# Altium PCB RSxxx для сумматора.PcbDoc
Units mm, origin at the board's own origin, x right, y up, seen from the top; angles counter-clockwise.
Board outline 22.3 x 25.4 mm, 2 copper layers (Top Layer, Bottom Layer), stack 1.5 mm thick; 18 components, 12 nets, 59 pads, 31 vias.
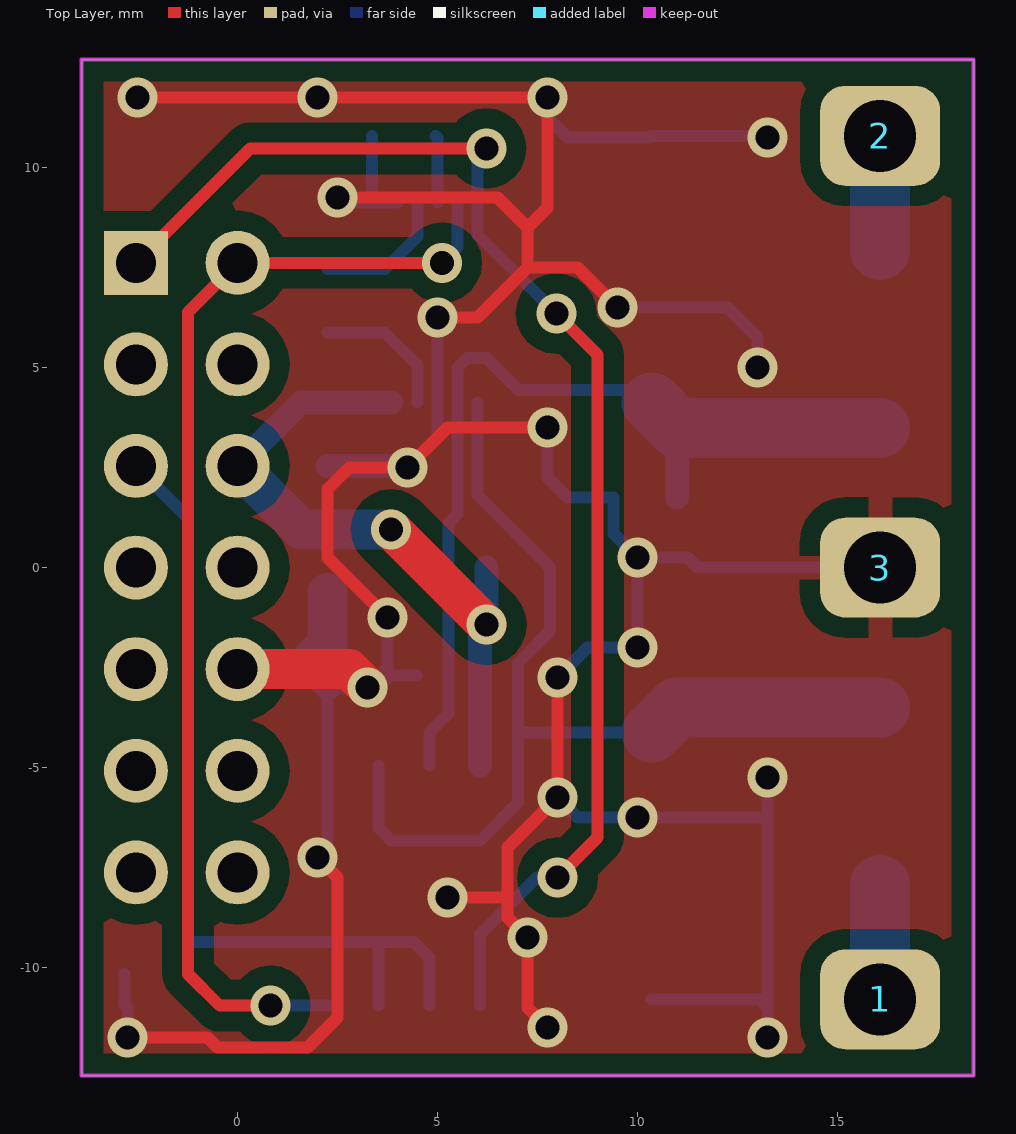
[diagram p0: Top Layer view]
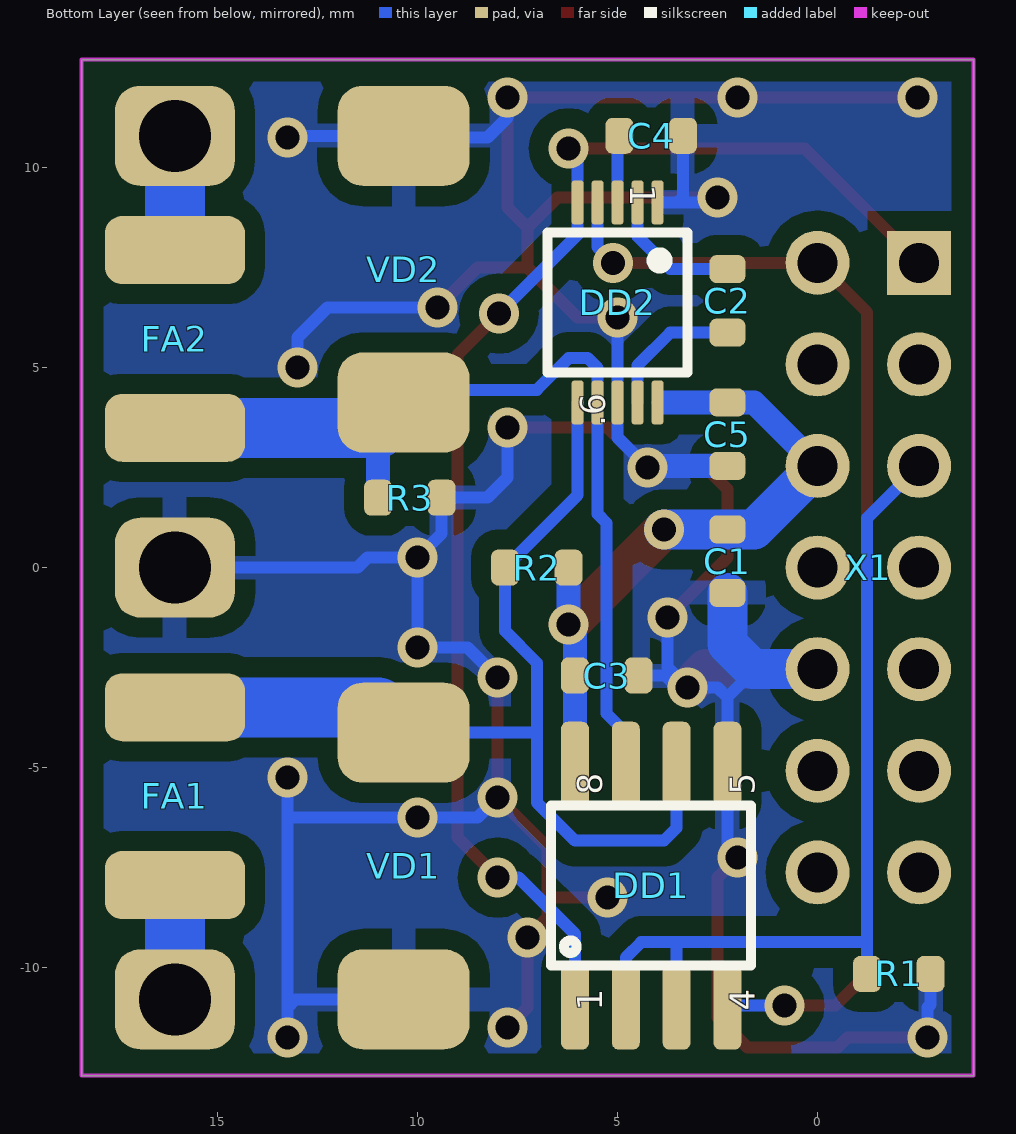
[diagram p1: Bottom Layer view, seen from below]
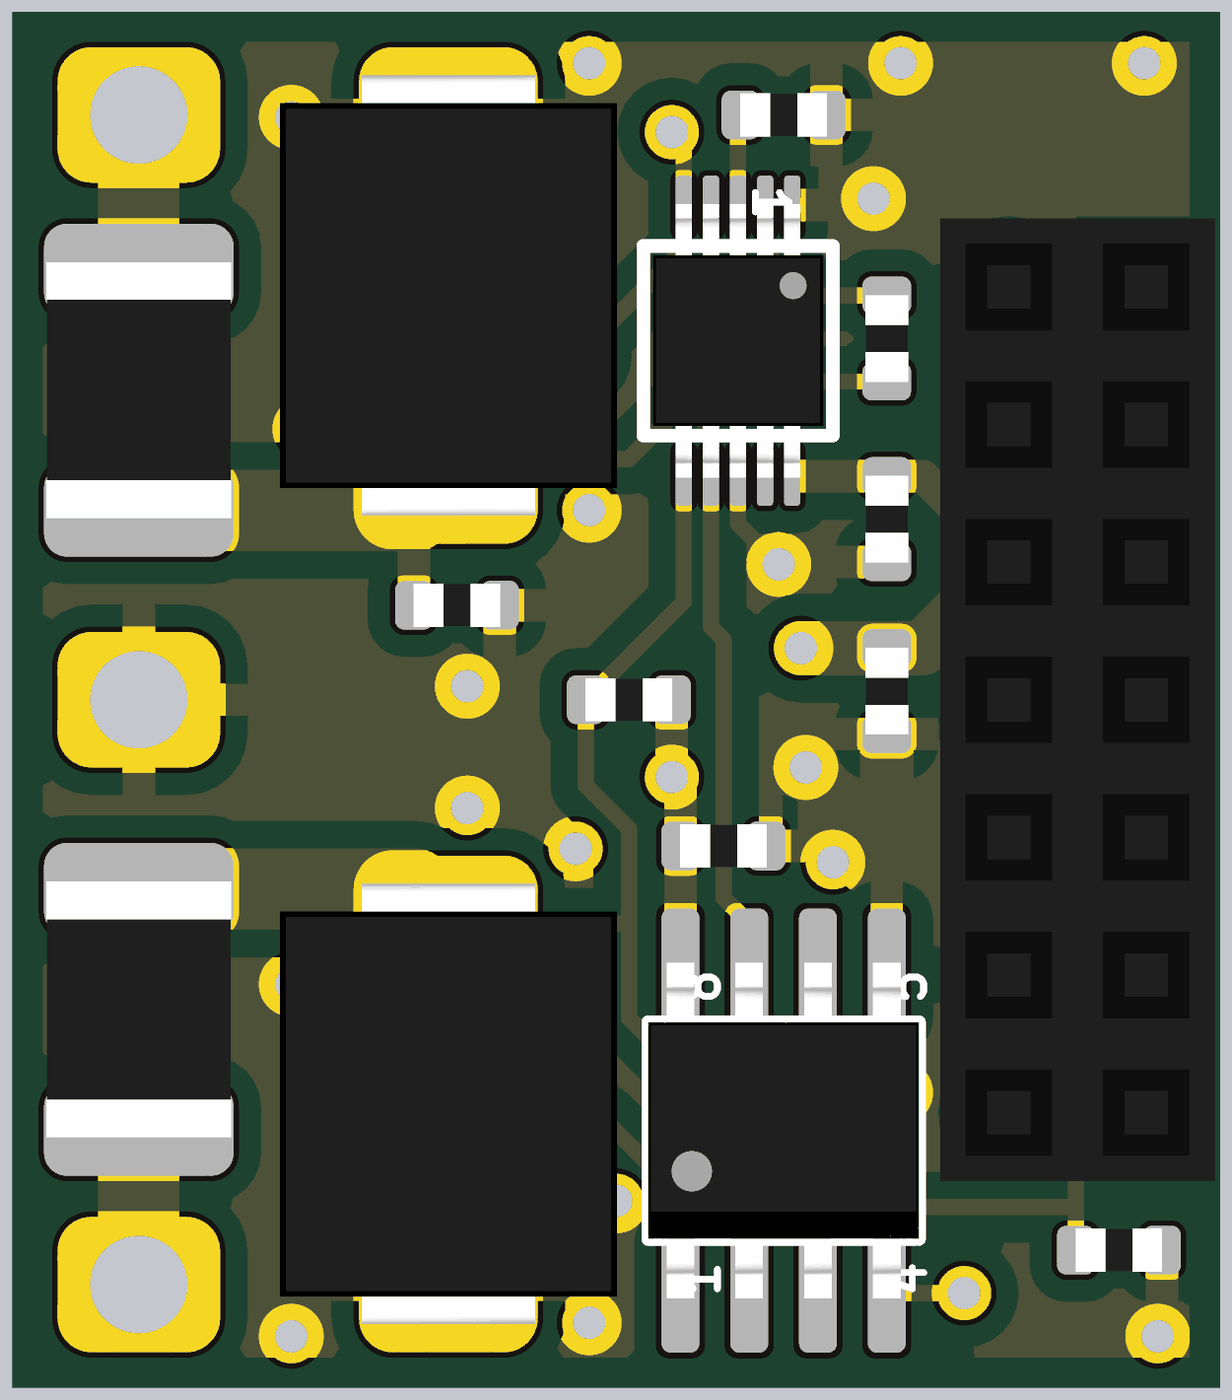
[diagram p2: 3D render of the assembled board from below, using the file's embedded part models]

## Layer stack, top to bottom
Top Layer: signal copper 0.045
Dielectric: core 1.41, FR-4, Dk 4.8
Bottom Layer: signal copper 0.045

## Board outline
-3.9,-12.7 -3.9,12.7 18.4,12.7 18.4,-12.7

## Design rules (kind name [scope] priority, off if disabled: settings)
Clearance Clearance_OutLay_Poly [inPoly and OnOutside] p1: gap=0.5
Clearance [All] p2: gap=0.2
Clearance "Clearance_Top Layer, Top_PadToPad" [ExistsOnLayer('Top Layer, Top') And IsPad vs ExistsOnLayer('Top Layer, Top') And IsPad] p3: gap=0.2
Clearance "Clearance_Top Layer, Top_PadToLine" [ExistsOnLayer('Top Layer, Top') And IsPad vs ExistsOnLayer('Top Layer, Top') And IsWire] p4: gap=0.2
Clearance "Clearance_Top Layer, Top_LineToLine" [ExistsOnLayer('Top Layer, Top') And IsWire vs ExistsOnLayer('Top Layer, Top') And IsWire] p5: gap=0.2
Clearance "Clearance_Top Layer, Top_ViaToPad" [ExistsOnLayer('Top Layer, Top') And IsVia vs ExistsOnLayer('Top Layer, Top') And IsPad] p6: gap=0.2
Clearance "Clearance_Top Layer, Top_ViaToLine" [ExistsOnLayer('Top Layer, Top') And IsVia vs ExistsOnLayer('Top Layer, Top') And IsWire] p7: gap=0.2
Clearance "Clearance_Top Layer, Top_ViaToVia" [ExistsOnLayer('Top Layer, Top') And IsVia vs ExistsOnLayer('Top Layer, Top') And IsVia] p8: gap=0.2
Clearance "Clearance_Bottom Layer, Bottom_PadToPad" [ExistsOnLayer('Bottom Layer, Bottom') And IsPad vs ExistsOnLayer('Bottom Layer, Bottom') And IsPad] p9: gap=0.2
Clearance "Clearance_Bottom Layer, Bottom_PadToLine" [ExistsOnLayer('Bottom Layer, Bottom') And IsPad vs ExistsOnLayer('Bottom Layer, Bottom') And IsWire] p10: gap=0.2
Clearance "Clearance_Bottom Layer, Bottom_LineToLine" [ExistsOnLayer('Bottom Layer, Bottom') And IsWire vs ExistsOnLayer('Bottom Layer, Bottom') And IsWire] p11: gap=0.2
Clearance "Clearance_Bottom Layer, Bottom_ViaToPad" [ExistsOnLayer('Bottom Layer, Bottom') And IsVia vs ExistsOnLayer('Bottom Layer, Bottom') And IsPad] p12: gap=0.2
Clearance "Clearance_Bottom Layer, Bottom_ViaToLine" [ExistsOnLayer('Bottom Layer, Bottom') And IsVia vs ExistsOnLayer('Bottom Layer, Bottom') And IsWire] p13: gap=0.2
Clearance "Clearance_Bottom Layer, Bottom_ViaToVia" [ExistsOnLayer('Bottom Layer, Bottom') And IsVia vs ExistsOnLayer('Bottom Layer, Bottom') And IsVia] p14: gap=0.2
Clearance Clearance_Design_HoleToHole [(IsVia Or IsThruPin) vs (IsVia Or IsThruPin)] p15: gap=0.2
ComponentClearance [All] p1: gap=0 collisioncheckmode=3 verticalgap=0 showdistances=FALSE
Height [All] p1: minheight=0 maxheight=50 prefheight=25
HoleSize [All] p1: absolutevalues=TRUE maxlimit=5 minlimit=0.6 maxpercent=80.000 minpercent=20.000
HoleToHoleClearance [All] p1: gap=0.2 allowstackedmicrovias=TRUE
MinimumSolderMaskSliver [All] p1: minsoldermaskwidth=0
PlaneClearance [All] p1: clearance=0.2
PlaneConnect [All] p1: planeconnectstyle=Relief reliefexpansion=0.5 reliefentries=4 reliefconductorwidth=0.6 reliefairgap=0.2
PolygonConnect PolygonConnect_14 [IsPolygon And InNet('0V') And OnLayer('Bottom Layer') vs IsVia] p1: connectstyle=Direct reliefconductorwidth=0.381 reliefentries=4 polygonreliefangle="90 Angle"
PolygonConnect PolygonConnect_13 [IsPolygon And InNet('0V') And OnLayer('Bottom Layer') vs IsPad] p2: connectstyle=Relief reliefconductorwidth=0.6 reliefentries=4 polygonreliefangle="90 Angle"
PolygonConnect PolygonConnect_2 [IsPolygon And InNet('0V') And OnLayer('Top Layer') vs IsVia] p3: connectstyle=Direct reliefconductorwidth=0.381 reliefentries=4 polygonreliefangle="90 Angle"
PolygonConnect PolygonConnect_1 [IsPolygon And InNet('0V') And OnLayer('Top Layer') vs IsPad] p4: connectstyle=Relief reliefconductorwidth=0.6 reliefentries=4 polygonreliefangle="90 Angle"
PolygonConnect [All] p5: connectstyle=Relief reliefconductorwidth=0.6 reliefentries=4 polygonreliefangle="90 Angle"
RoutingVias [All] p1: holewidth=0.6 width=1 viastyle="Through Hole" minholewidth=0.6 minwidth=1 maxholewidth=0.6 maxwidth=1
SilkToSilkClearance [All] p1: silktosilkclearance=0
SilkscreenOverComponentPads [All] p1: minsilkscreentomaskgap=0
SolderMaskExpansion [All] p1: expansion=0.1
Width [All] p1: maxlimit=3 minlimit=0.1 preferedwidth=0.3
19 further rules are at their usual default settings.

## Components (designator, comment, footprint, x,y, rotation, side; value= is the part's Value field where it differs from the comment)
1 "PAD D01,8 02,5x03.0" "PAD D01,8 02,5x03.0" 16.066,-10.795 r0 top
2 "PAD D01,8 02,5x03.0" "PAD D01,8 02,5x03.0" 16.066,10.795 r0 top
3 "PAD D01,8 02,5x03.0" "PAD D01,8 02,5x03.0" 16.066,0 r0 top
C1 "X7R 0603-50 В-0,1 мкФ±15 %" PAT0603 2.254,-0.635 r90 bottom
C2 "X7R 0603-50 В-0,1 мкФ±15 %" PAT0603 2.254,7.461 r270 bottom
C3 "X7R 0603-50 В-0,1 мкФ±15 %" PAT0603 4.477,-2.699 r0 bottom
C4 "X7R 0603-50 В-0,1 мкФ±15 %" PAT0603 3.365,10.795 r0 bottom
C5 "X7R 0603-50 В-0,1 мкФ±15 %" PAT0603 2.254,2.54 r90 bottom
DD1 "ADM485ARZ" "SO-08 (150MIL)" 6.064,-10.954 r90 bottom
DD2 "ADM101EARMZ" "SO-10 MIKRO" 4,9.128 r270 bottom
FA1 "GP-WSM010" GP-WMS010 16.066,-3.492 r270 bottom
FA2 "GP-WSM010" GP-WMS010 16.066,3.492 r90 bottom
R1 "0603 0,1 Вт-10 кОм±5 %" PAT0603 -2.826,-10.16 r0 bottom
R2 "0603 0,1 Вт-10 кОм±5 %" PAT0603 7.81,0 r180 bottom
R3 "0603 0,1 Вт-10 кОм±5 %" PAT0603 9.398,1.746 r0 bottom
VD1 "SM15T12CA" SMC 10.351,-10.796 r90 bottom
VD2 "SM15T12CA" SMC 10.351,10.795 r270 bottom
X1 "PBD-14" PBD-14 -2.54,7.62 r90 bottom

## Footprints (in the part's own frame and the unit in brackets; to place one, negate y for a bottom-side part, rotate by r counter-clockwise, add the part's x,y. Pads: shape width x height; smd on the part's side, far side on the other; paste and mask are expansions set on the pad)
GP-WMS010 [mm]
  rrect50% 1.7x3.5 smd: 1(0,0) 2(4.445,0)
  body extent -0.14,-1.71 4.59,1.71, height 0.83
"PAD D01,8 02,5x03.0" [mm]
  rrect50% 3x2.5 hole 1.8: 1(0,0)
PAT0603 [mm]
  rrect50% 0.7x0.9 smd: 1(0,0) 2(1.587,0)
  body extent -0.01,-0.4 1.59,0.4, height 0.82
PBD-14 [mm]
  rect 1.6x1.6 hole 1: 1(0,0)
  round 1.6 hole 1: 2(0,2.54) 3(-2.54,0) 4(-2.54,2.54) 5(-5.08,0) 6(-5.08,2.54) 7(-7.62,0) 8(-7.62,2.54) 9(-10.16,0) 10(-10.16,2.54) 11(-12.7,0) 12(-12.7,2.54) 13(-15.24,0) 14(-15.24,2.54)
  body extent -16.51,-1.27 1.27,3.81, height 8.42
SMC [mm]
  rrect50% 2.5x3.3 smd paste-25.4: 1(0,0) 2(6.668,0)
  body extent -0.73,-3.11 7.4,3.11, height 2.64
"SO-08 (150MIL)" [mm]
  rrect50% 2.2x0.7 smd mask-25.4: 1(0,0) 2(0,-1.27) 3(0,-2.54) 4(0,-3.81) 5(6,-3.81) 6(6,-2.54) 7(6,-1.27) 8(6,0)
  silkscreen extent 1,-4.41 5,0.6, body extent -0.1,-4.41 6.1,0.6, height 1.77
"SO-10 MIKRO" [mm]
  rrect50% 1.1x0.3 smd: 1(0,0) 2(0,-0.5) 3(0,-1) 4(0,-1.5) 5(0,-2) 6(5,-2) 7(5,-1.5) 8(5,-1) 9(5,-0.5) 10(5,0)
  silkscreen extent 0.75,-2.75 4.25,0.75, body extent -0.02,-2.58 5.02,0.58, height 1.11

## Via types
v1: diameter 1, hole 0.6, Top Layer to Bottom Layer, 31 vias

## Nets (pads, with @x,y where several pads share a name; then routed paths per layer and width w, separated by ;. In a path a pad name is that pad's centre, name@x,y a point inside that pad or via, vN(x,y) a via of type N, cw(c..) or ccw(c..) an arc to the next point about the centre after c; other vN are vias at no path point)
0V: 3.1 C1.1 C3.1 C4.1 C5.1 DD1.5 DD2.1 DD2.8 R1.1 R3.1 VD1.1 VD2.1 X1.10 | length 125.1
  Top Layer w0.3: v1(-2.75,-11.75) -0.75,-11.75 -0.5,-12 1.75,-12 2.5,-11.25 2.5,-7.75 v1(2,-7.25) ; v1(-2.5,11.75) v1(2,11.75) v1(7.75,11.75) 7.75,9 7.25,8.5 ; v1(2.5,9.25) 6.5,9.25 7.25,8.5 ; v1(3.75,-1.25) 2.25,0.25 2.25,1.96 2.79,2.5 v1(4.25,2.5) 5.25,3.5 v1(7.75,3.5) ; v1(5,6.25) 6,6.25 7.25,7.5 ; v1(5.25,-8.25) 6.75,-8.25 ; v1(7.75,-11.5) 7.25,-11 v1(7.25,-9.25) 6.75,-8.75 6.75,-8.25 ; v1(8,-2.75) v1(8,-5.75) 6.75,-7 6.75,-8.25 ; v1(9.5,6.5) 8.5,7.5 7.25,7.5 ; 7.25,7.5 7.25,8.5
  Top Layer w1: X1.10 2.79,-2.54 v1(3.25,-3)
  Bottom Layer w0.3: R1.1 -2.826,-10.924 -2.75,-11 v1(-2.75,-11.75) ; 1.619,-2.611 2.254,-3.246 ; v1(2,-7.25) 2.254,-6.996 DD1.5 2.254,-3.246 ; v1(2.5,9.25) 2.622,9.128 3.5,9.128 ; C4.1 3.365,9.262 3.5,9.128 ; v1(3.75,-1.25) 3.75,-2.5 v1(3.25,-3) ; DD2.1 3.5,9.128 ; v1(4.25,2.5) 5.001,3.251 DD2.8 v1@5.001,6.249 ; C3.1 3.801,-2.699 3.5,-3 v1(3.25,-3) ; v1(7.75,3.5) 7.75,2.25 8.25,1.75 9.394,1.75 R3.1 9.398,0.852 v1(10,0.25) ; v1(7.75,11.75) 7.75,11.25 8.25,10.75 10.305,10.75 VD2.1 v1@13.205,10.795 ; v1(8,-5.75) 8.5,-6.25 v1(10,-6.25) 13.25,-6.25 ; v1(8,-2.75) 8.75,-2 v1(10,-2) v1(10,0.25) ; v1(9.5,6.5) 12.25,6.5 13,5.75 v1(13,5) ; VD1.1 13.045,-10.796 13.25,-11 ; v1(13.25,-11.75) 13.25,-11 ; v1(13.25,-5.25) 13.25,-6.25 ; 3.1 11.5,0 11.25,0.25 v1(10,0.25) ; 2.254,-3.246 2.5,-3 v1(3.25,-3) ; 13.25,-11 13.25,-6.25
  Bottom Layer w0.6: C5.1 4.21,2.54 v1(4.25,2.5)
  Bottom Layer w1: X1.10@0.032,-2.54 X1.10 1.619,-2.54 2.254,-1.905 C1.1
  other v1: 13.25,10.75
+5V: C1.2 C3.2 C5.2 DD1.8 DD2.10 R2.2 X1.6 | length 17.5
  Top Layer w1: v1(3.842,0.953) v1(6.223,-1.429)
  Bottom Layer w0.3: 3.842,4.127 DD2.10
  Bottom Layer w0.6: X1.6 1.587,4.127 C5.2 3.842,4.127 ; DD1.8 C3.2 6.064,-1.587 v1(6.223,-1.429) R2.2
  Bottom Layer w1: X1.6 1.587,0.953 C1.2 v1(3.842,0.953)
A/R: DD1.6 DD2.6 FA1.1 R2.1 VD1.2 | length 26
  Bottom Layer w0.3: DD1.6 3.524,-6.509 3.842,-6.826 6.064,-6.826 7.017,-5.874 7.017,-4.127 ; DD2.6 6.001,1.81 R2.1 7.81,-1.587 7.017,-2.381 7.017,-4.127 ; VD1.2 7.017,-4.127
  Bottom Layer w1.5: VD1.2 10.986,-3.492 FA1.1
B/T: DD1.7 DD2.7 FA2.1 R3.2 VD2.2 | length 23.2
  Bottom Layer w0.3: DD1.7 4.794,-4.127 5.271,-3.651 5.271,1.111 5.5,1.341 DD2.7 5.5,4.992 5.747,5.239 6.223,5.239 7.017,4.445 VD2.2@10.351,4.445
  Bottom Layer w0.6: R3.2 VD2.2@10.986,3.492
  Bottom Layer w1.5: VD2.2 10.985,3.492 FA2.1
D/T: DD1.4 DD2.4 X1.2 | length 28.9
  Top Layer w0.3: v1(0.826,-10.954) -0.445,-10.954 -1.238,-10.16 -1.238,6.382 X1.2 v1(5.112,7.62)
  Bottom Layer w0.3: v1(0.826,-10.954) DD1.4 ; v1(5.112,7.62) 5.5,8.009 DD2.4
Net1_1: 1.1 FA1.2 | length 2.9
  Bottom Layer w1.5: 1.1 FA1.2
Net2_1: 2.1 FA2.2 | length 2.9
  Bottom Layer w1.5: FA2.2 2.1
NetC2_1: C2.1 DD2.2 | length 3.4
  Bottom Layer w0.3: C2.1 3.683,7.461 4.5,8.279 DD2.2
NetC2_2: C2.2 DD2.9 | length 3.5
  Bottom Layer w0.3: C2.2 3.683,5.874 4.5,5.056 DD2.9
NetC4_2: C4.2 DD2.3 | length 1.7
  Bottom Layer w0.3: C4.2 5.001,10.747 DD2.3
R: DD1.1 DD2.5 X1.1 | length 34.2
  Top Layer w0.3: X1.1 0.318,10.477 v1(6.223,10.477) ; v1(7.969,6.35) 9,5.319 9,-6.75 v1(8,-7.75)
  Bottom Layer w0.3: DD1.1 6.064,-9.161 7.475,-7.75 v1(8,-7.75) ; v1(6.223,10.477) 6.001,10.255 DD2.5 6.001,8.319 v1(7.969,6.35)
RE/DE: DD1.2 DD1.3 R1.2 X1.5 | length 22.2
  Bottom Layer w0.3: X1.5 -1.238,1.238 -1.238,-9.366 ; R1.2 -1.238,-9.366 ; DD1.3 3.524,-9.366 ; DD1.2 4.794,-9.749 4.411,-9.366 3.524,-9.366 ; -1.238,-9.366 3.524,-9.366
pads on no net: X1.3 X1.4 X1.7 X1.8 X1.9 X1.11 X1.12 X1.13 X1.14

## Polygon pours and split planes (outlines as drawn)
0V on Top Layer "Top Layer, Top-+3VD" (solid, pour order 1000): -3.9,12.7 -3.9,-12.7 18.4,-12.7 18.4,12.7
0V on Bottom Layer "Top Layer, Top-+3VD" (solid, pour order 1001): -3.9,12.7 -3.9,-12.7 18.4,-12.7 18.4,12.7

## Keep-outs
Keep-Out Layer:
  the board outline again, w0.1

## Silkscreen, mask and mechanical layers (free items; w line width, h text height)
Mechanical 1:
  lines w0.1: 0,0 18.764,0

## Text inside footprints (layer, text, board x,y; h text height)
DD1: Bottom Overlay "4" at 1.567,-11.074 h0.63 r270; Bottom Overlay "1" at 5.377,-11.074 h0.63 r270; Bottom Overlay "5" at 1.567,-5.676 h0.63 r270; Bottom Overlay "8" at 5.377,-5.676 h0.63 r270
DD2: Bottom Overlay "1" at 4.688,9.565 h0.63 r90